# Altium PCB encoder.PcbDoc
Units mm, origin at the board's own origin, x right, y up, seen from the top; angles counter-clockwise.
Board outline 65.16 x 54.74 mm, 2 copper layers (Top Layer, Bottom Layer); 18 components, 21 nets, 72 pads, 10 vias.
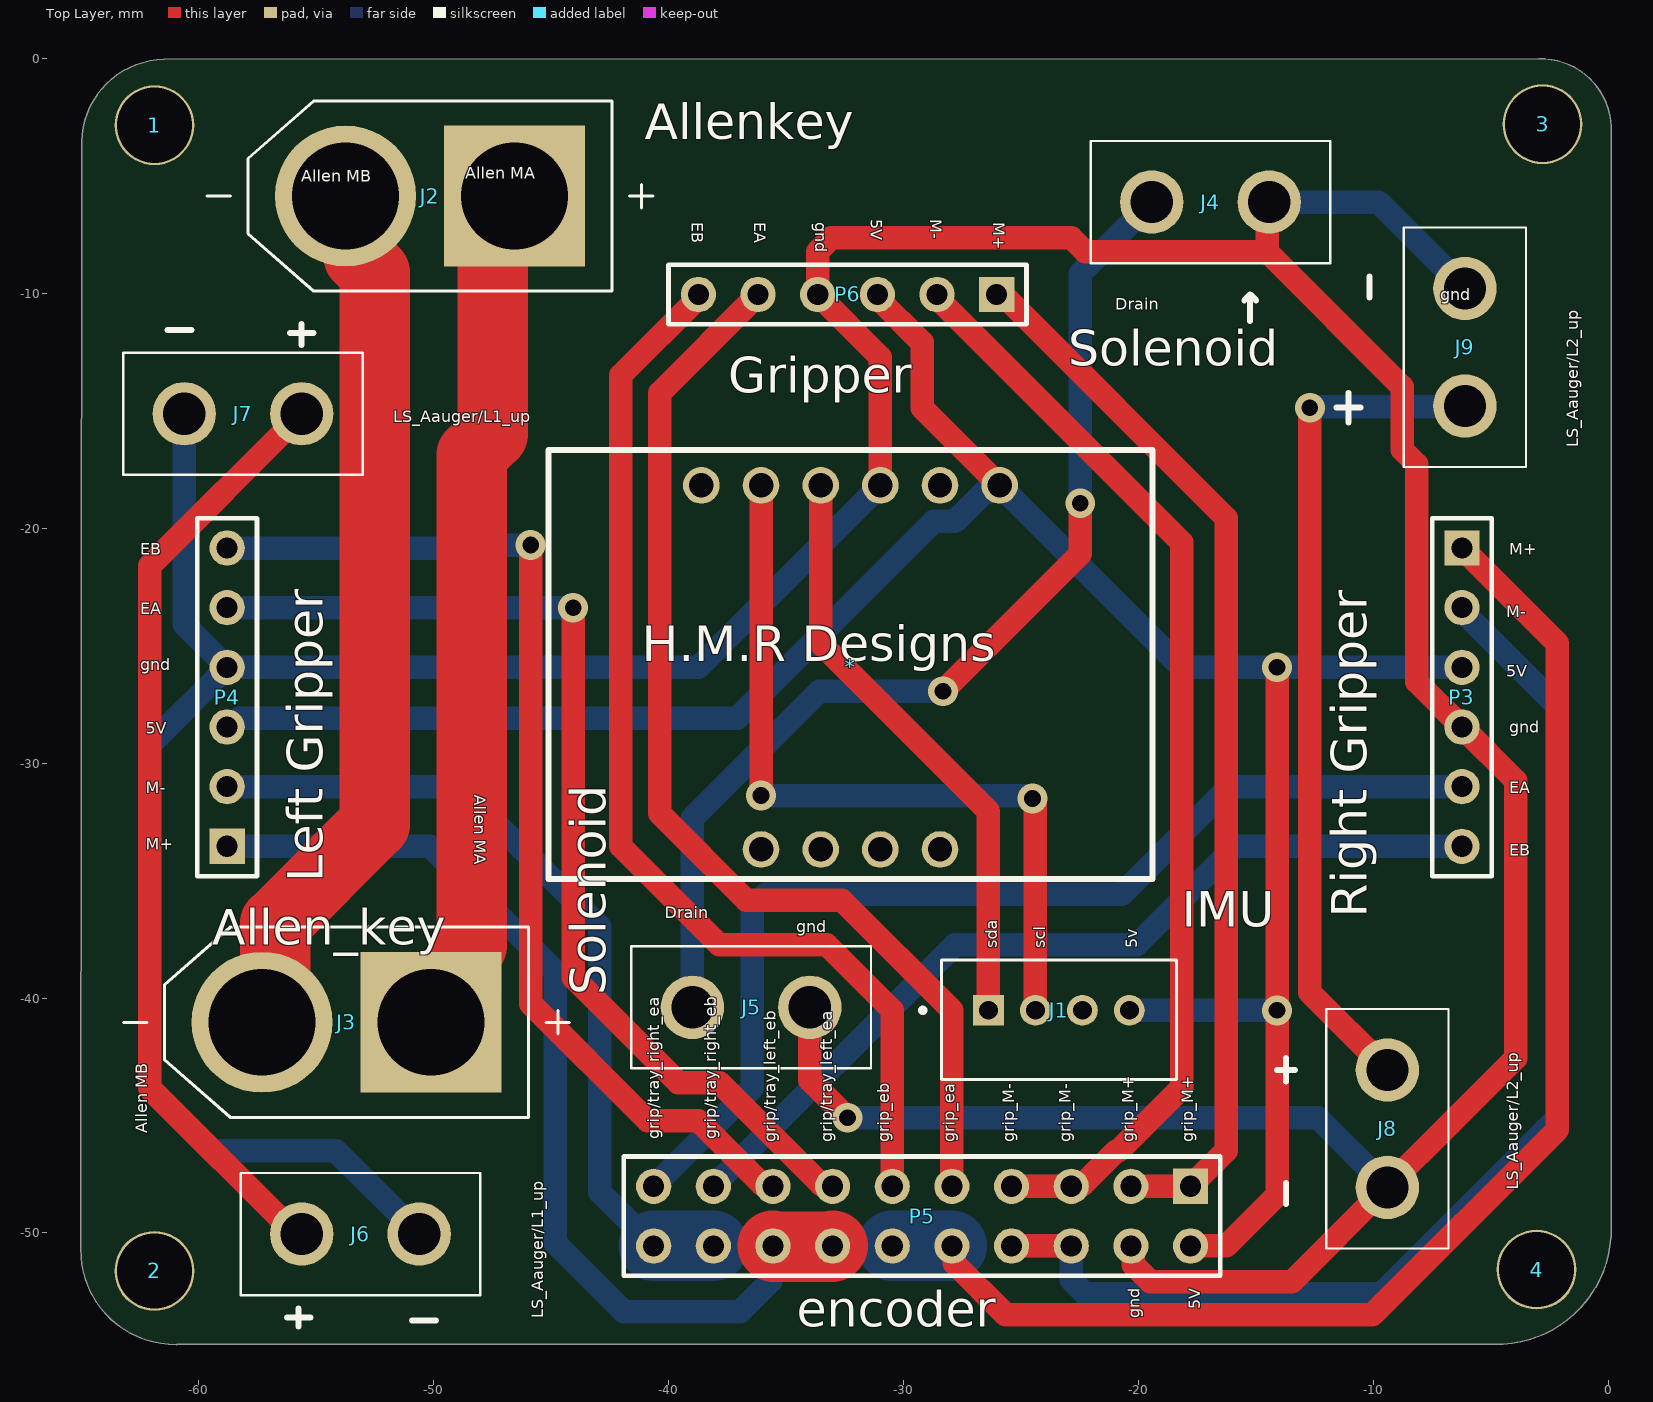
[diagram p0: Top Layer view]
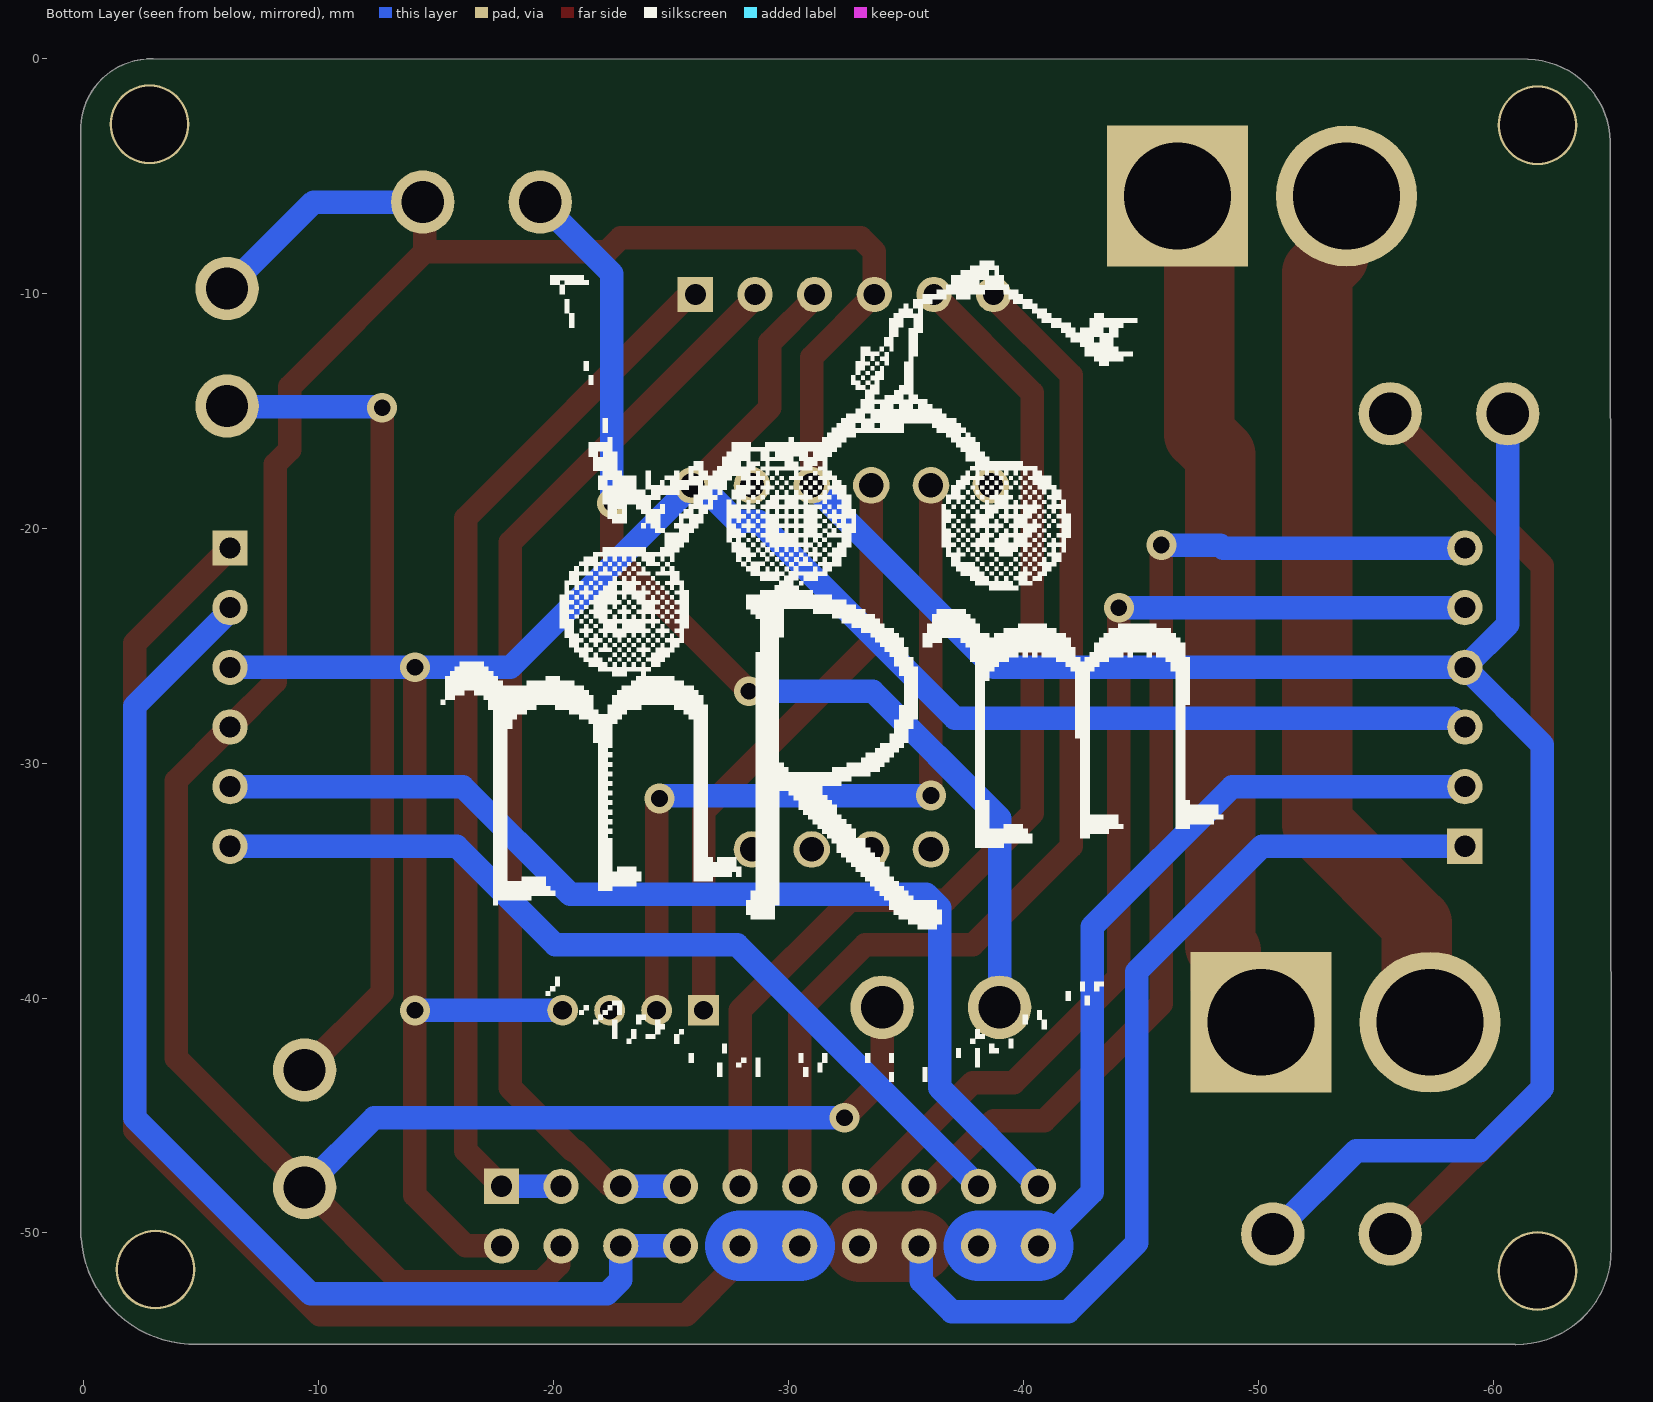
[diagram p1: Bottom Layer view, seen from below]
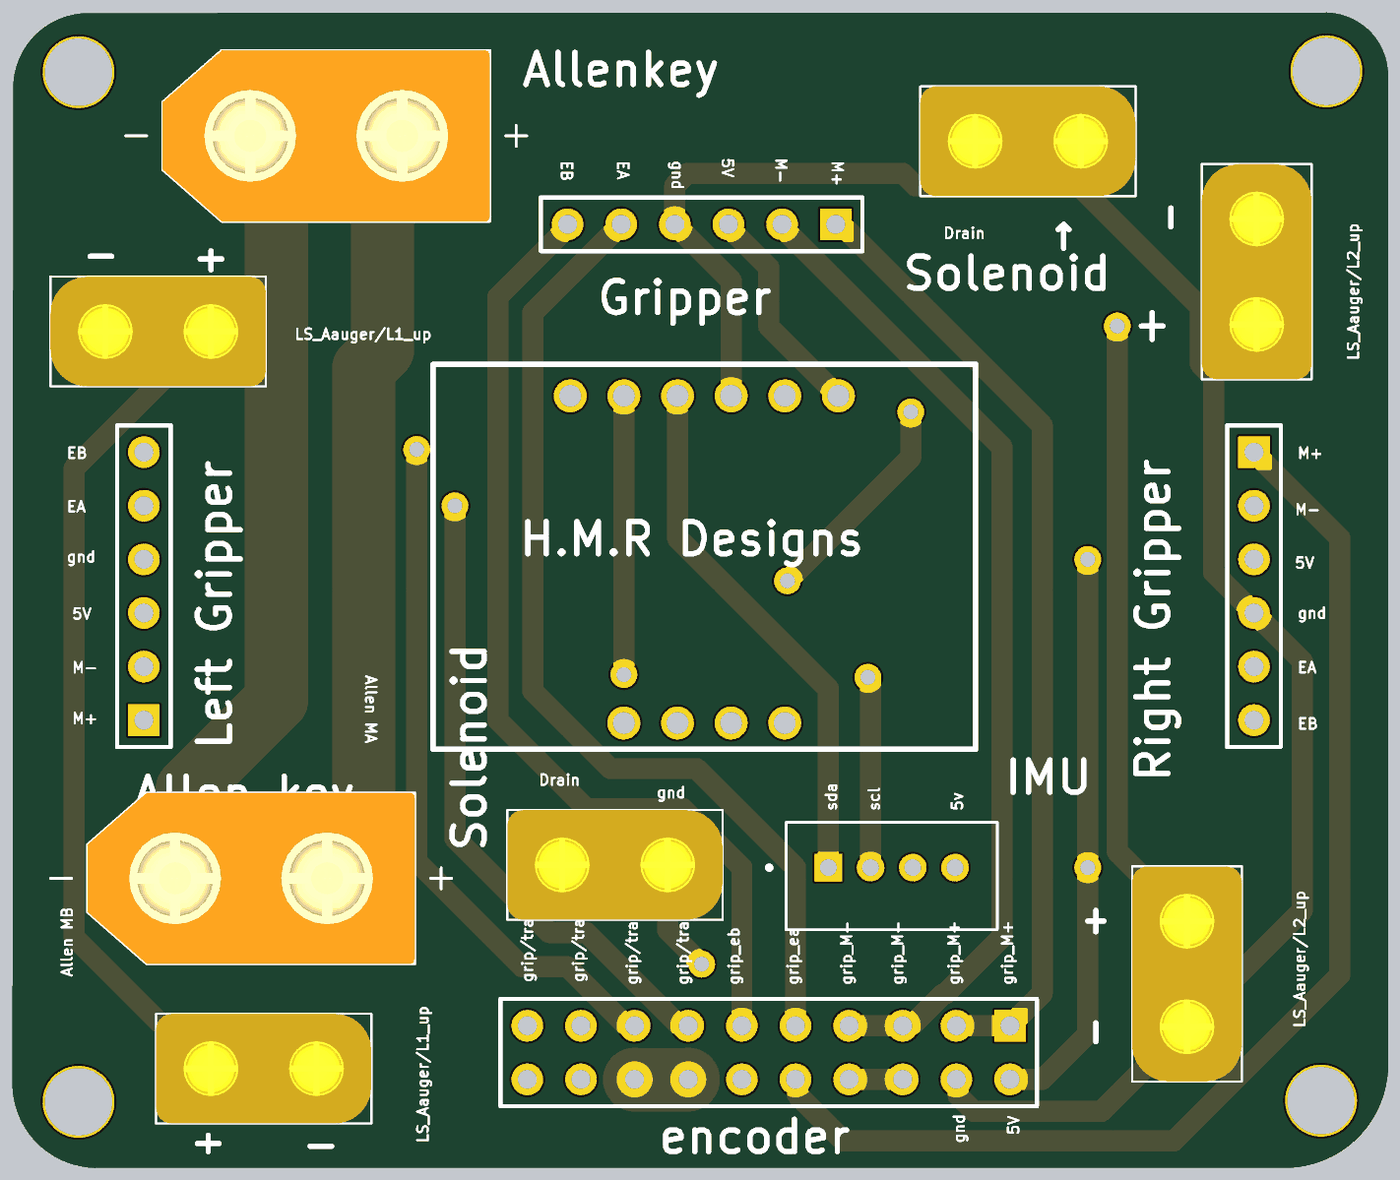
[diagram p2: 3D render of the assembled board from above, using the file's embedded part models]

## Layer stack, top to bottom
Top Solder: solder mask 0.0102, Solder Resist, Dk 3.5
Top Layer: signal copper 0.0356
Dielectric 1: dielectric 0.32, FR-4, Dk 4.8
Bottom Layer: signal copper 0.0356
Bottom Solder: solder mask 0.0102, Solder Resist, Dk 3.5

## Board outline
-65.029,-50.678 ccw(c-61.023,-50.744) -60.958,-54.749 ccw(c-60.96,-54.622) -60.928,-54.745 -4.855,-54.745 ccw(c-4.826,-54.621) -4.828,-54.748 ccw(c-4.762,-49.855) 0.117,-50.222 ccw(c0,-50.172) 0.127,-50.172 0.127,-50.044 0.127,-2.921 ccw(c0.001,-2.921) 0.127,-2.907 ccw(c-2.857,-2.992) -2.93,-0.008 ccw(c-2.92,-0.456) -2.932,-0.008 -2.93,-0.008 -61.494,-0.033 ccw(c-61.494,-0.133) -61.496,-0.033 ccw(c-61.432,-3.593) -64.991,-3.525 ccw(c-64.862,-3.528) -64.991,-3.528 -65.024,-50.648 ccw(c-64.901,-50.68)

## Design rules (kind name [scope] priority, off if disabled: settings)
Clearance [All] p1: gap=0.254 ignorepadtopadclearanceinfootprint=FALSE except(0: Arc-Hole Track-Hole SMDPad-Hole THPad-Hole Via-Hole Fill-Hole Poly-Hole Region-Hole Text-Hole)
PolygonConnect [All] p1: connectstyle=Relief reliefconductorwidth=0.254 reliefentries=4 polygonreliefangle="90 Angle" airgapwidth=0.254
RoutingVias [All] p1: holewidth=0.711 width=1.27 viastyle="Through Hole" minholewidth=0.711 minwidth=1.27 maxholewidth=0.711 maxwidth=1.27
SolderMaskExpansion [All] p1: expansion=0.102 istentingtop=FALSE
Width [All] p1: maxlimit=10 minlimit=0.254 preferedwidth=3 minimp=50.000000 maximp=50.000000 favimp=50.000000
30 further rules are at their usual default settings.

## Components (designator, comment, footprint, x,y, rotation, side; value= is the part's Value field where it differs from the comment)
1 "mountinghole_np" np_mountinghole#1 -62.357,-3.135 r90 top
2 "mountinghole_np" np_mountinghole#2 -61.849,-52.204 r90 top
3 "mountinghole_np" np_mountinghole#3 -3.477,-3.985 r90 top
4 "mountinghole_np" np_mountinghole#4 -2.048,-51.546 r90 top
* "bno" BNO -25.908,-18.168 r180 top
J1 "110990030" SEEED_110990030 -23.384,-40.52 r0 top
J2 "XT60-M" AMASS_XT60-M -50.165,-5.849 r180 top
J3 "XT60-M" AMASS_XT60-M -53.721,-41.028 r180 top
J4 "XT30PB" XT30PB -19.431,-6.103 r90 top
J5 "XT30PB" XT30PB -38.989,-40.393 r90 top
J6 "XT30PB" XT30PB -55.626,-50.045 r90 top
J7 "XT30PB" XT30PB -55.626,-15.12 r270 top
J8 "XT30PB" XT30PB -9.398,-43.06 r0 top
J9 "XT30PB" XT30PB -6.096,-14.786 r180 top
P3 "Header 6" HDR1X6 -6.223,-20.835 r270 top
P4 "Header 6" HDR1X6 -58.801,-33.535 r90 top
P5 "Header 10X2" HDR2X10 -17.78,-48.013 r180 top
P6 "Header 6" HDR1X6 -26.035,-10.04 r180 top

## Footprints (in the part's own frame and the unit in brackets; to place one, negate y for a bottom-side part, rotate by r counter-clockwise, add the part's x,y. Pads: shape width x height; smd on the part's side, far side on the other; paste and mask are expansions set on the pad)
AMASS_XT60-M [mm]
  round 6 hole 4.55: N(3.6,0)
  rect 6x6 hole 4.55: P(-3.6,0)
  silkscreen extent -9.5,-4.05 9.5,4.05, body extent -7.75,-4.05 7.75,4.05, height 16
BNO [mm]
  round 1.56 hole 1.04: 6(5.08,15.5) 7(7.62,15.5) 8(10.16,15.5) 9(2.54,15.5) 10(5.08,0) 11(7.62,0) 12(0,0) 13(2.54,0) 14(10.16,0) 15(12.7,0)
  silkscreen extent -6.5,-1.5 19.2,16.75
HDR1X6 [mm] "Connector; Header; 6 Position"
  rect 1.5x1.5 hole 0.9: 1(0,0)
  round 1.5 hole 0.9: 2(2.54,0) 3(5.08,0) 4(7.62,0) 5(10.16,0) 6(12.7,0)
  silkscreen extent -1.27,-1.27 13.97,1.27
HDR2X10 [mm] "Connector; Header; 10x2 Position"
  rect 1.5x1.5 hole 0.9: 1(0,0)
  round 1.5 hole 0.9: 2(0,2.54) 3(2.54,0) 4(2.54,2.54) 5(5.08,0) 6(5.08,2.54) 7(7.62,0) 8(7.62,2.54) 9(10.16,0) 10(10.16,2.54) 11(12.7,0) 12(12.7,2.54) 13(15.24,0) 14(15.24,2.54) 15(17.78,0) 16(17.78,2.54) 17(20.32,0) 18(20.32,2.54) 19(22.86,0) 20(22.86,2.54)
  silkscreen extent -1.27,-1.27 24.13,3.81
np_mountinghole#1 [mm]
  round 3.4 hole 3.2 unplated: MH_NP_6mm(0.302,-0.46)
np_mountinghole#2 [mm]
  round 3.4 hole 3.2 unplated: MH_NP_6mm(0.587,0.048)
np_mountinghole#3 [mm]
  round 3.4 hole 3.2 unplated: MH_NP_6mm(1.191,-0.683)
np_mountinghole#4 [mm]
  round 3.4 hole 3.2 unplated: MH_NP_6mm(-0.016,1)
SEEED_110990030 [mm]
  rect 1.308x1.308 hole 0.8: 1(-3,0)
  round 1.308 hole 0.8: 2(-1,0) 3(1,0) 4(3,0)
  silkscreen extent -5.9,-2.95 5,2.15
XT30PB [mm]
  round 2.7 hole 1.8: 1(0,0) 2(0,-5)
  silkscreen extent -2.6,-7.6 2.6,2.6, body extent -2.6,-7.6 2.6,2.6, height 10.66

## Part data
J1: "GROVE 2MM 4PIN VERT CONN 10PCS", Package=None, Arrow_Electronics-Purchase-URL=https://snapeda.com/shop?store=Arrow+Electronics&id=583576, Availability=Good, MF="Seeed Technology", Mouser-Purchase-URL=https://snapeda.com/shop?store=Mouser&id=583576, MP=110990030, Price=None, SnapEDA_Link=https://www.snapeda.com/parts/110990030/Seeed%20Technology%20Co.,%20Ltd/view-part/583576/?ref=snap
J2 J3: "Plug; DC supply; XT60; male; PIN: 2; for cable; soldered; 30A; 500V", Package=Package, Availability="Not in stock", Check_prices=https://www.snapeda.com/parts/XT60-M/AMASS/view-part/?ref=eda, MF=AMASS, MP=XT60-M, Price=None, SnapEDA_Link=https://www.snapeda.com/parts/XT60-M/AMASS/view-part/?ref=snap
J4 J5 J6 J7 J8 J9: "Connector", Manufacturer_Name=Amass, Datasheet Link=https://www.tme.eu/Document/4acc913878197f8c2e30d4b8cdc47230/XT30UPB%20SPEC.pdf, Height=10.7mm, Manufacturer_Part_Number=XT30PB
P3 P4 P6: "Header, 6-Pin", LatestRevisionDate=17-Jul-2002, LatestRevisionNote="Re-released for DXP Platform.", Publisher="Altium Limited"
P5: "Header, 10-Pin, Dual row", LatestRevisionDate=17-Jul-2002, LatestRevisionNote="Re-released for DXP Platform.", Publisher="Altium Limited"

## Via types
v1: diameter 1.27, hole 0.711, Top Layer to Bottom Layer, 10 vias

## Nets (pads, with @x,y where several pads share a name; then routed paths per layer and width w, separated by ;. In a path a pad name is that pad's centre, name@x,y a point inside that pad or via, vN(x,y) a via of type N, cw(c..) or ccw(c..) an arc to the next point about the centre after c; other vN are vias at no path point)
Net*_10: *.10 J4.2 J5.2 J6.2 J7.2 J8.2 J9.2 P3.4 P4.4 P5.4 P6.4 | length 208.1
  Top Layer w1: J5.2 -33.989,-43.488 v1(-32.385,-45.092) ; *.10 -30.988,-12.707 P6.4 -33.655,-8.213 -33.069,-7.627 -22.86,-7.627 -22.266,-8.222 -14.519,-8.222 ; P5.4 -20.224,-50.649 -20.224,-51.344 -19.49,-52.077 -13.462,-52.077 -9.421,-48.037 -6.73,-45.346 -3.937,-42.552 -3.937,-30.741 P3.4 -8.144,-26.534 -8.144,-17.268 -8.763,-16.649 -8.763,-13.977 -14.519,-8.222 ; J4.2@-14.859,-6.357 -14.519,-6.698 -14.519,-8.222
  Bottom Layer w1: J7.2 -60.626,-24.09 P4.4 ; J6.2 -54.182,-46.489 -59.436,-46.489 -62.103,-43.822 -62.103,-29.217 P4.4 ; v1(-32.385,-45.092) -12.366,-45.092 J8.2 ; *.10 -38.735,-25.915 P4.4 ; J4.2 -9.779,-6.103 J9.2
Net*_11: *.11 J1.1 | length 25.3
  Top Layer w1: *.11 -33.528,-24.899 -26.384,-32.043 J1.1
Net*_12: *.12 J1.4 P3.3 P4.3 P5.2 P6.3 | length 103.7
  Top Layer w1: P6.3 -31.115,-10.176 -29.21,-12.081 -29.21,-14.866 *.12 ; P5.2 -16.256,-50.553 -14.097,-48.394 v1(-14.097,-40.52) v1(-14.097,-25.915)
  Bottom Layer w1: P4.3 -58.666,-28.455 -58.285,-28.074 -37.084,-28.074 -28.712,-19.702 -27.813,-19.702 -26.559,-18.448 -26.34,-18.448 -26.06,-18.168 *.12 -18.161,-25.915 P3.3 ; J1.4 v1(-14.097,-40.52)
Net*_14: *.14 J1.2 | length 33.9
  Top Layer w1: v1(-36.068,-31.376) *.14 ; v1(-24.511,-31.503) -24.511,-31.576 -24.384,-31.703 J1.2
  Bottom Layer w1: v1(-36.068,-31.376) -24.711,-31.376 -24.584,-31.503 v1(-24.511,-31.503)
NetJ2_N: J2.N J3.N | length 37.7
  Top Layer w3: J3.N -56.747,-40.454 -56.747,-36.815 -52.522,-32.59 -52.522,-9.107 -53.191,-8.438 -53.191,-6.423 J2.N
NetJ2_P: J2.P J3.P | length 36.7
  Top Layer w3: J3.P -48.621,-39.528 -48.621,-38.005 -48.387,-37.771 -48.387,-16.873 -47.498,-15.984 -47.498,-6.782 J2.P
NetJ4_1: J4.1 J5.1 | length 45.5
  Top Layer w1: v1(-28.321,-26.931) -22.479,-21.089 v1(-22.479,-18.93)
  Bottom Layer w1: J5.1 -38.989,-32.333 -33.587,-26.931 v1(-28.321,-26.931) ; v1(-22.479,-18.93) -22.479,-9.151 J4.1
NetJ6_1: J6.1 J7.1 | length 40.4
  Top Layer w1: J6.1 -55.88,-50.045 -62.103,-43.822 -62.103,-21.597 J7.1
NetJ8_1: J8.1 J9.1 | length 36.2
  Top Layer w1: v1(-12.7,-14.859) -12.7,-39.758 J8.1
  Bottom Layer w1: v1(-12.7,-14.859) -12.664,-14.823 -6.132,-14.823 J9.1
NetP3_1: P3.1 P5.10 P5.12 | length 59.6
  Top Layer w1: P5.10 -27.844,-50.649 -27.844,-51.284 -25.654,-53.474 -10.033,-53.474 -2.159,-45.6 -2.159,-24.899 P3.1
  Bottom Layer w3: P5.12 P5.10
NetP3_2: P3.2 P5.6 P5.8 | length 54
  Top Layer w1: P5.8 P5.6
  Bottom Layer w1: P5.8 P5.6 -22.86,-52 -22.274,-52.585 -9.652,-52.585 -2.159,-45.092 -2.159,-27.575 -6.223,-23.511 P3.2
NetP3_5: P3.5 P5.19 | length 46
  Bottom Layer w1: P5.19 -36.449,-43.822 -36.449,-36.153 -35.863,-35.567 -20.701,-35.567 -16.129,-30.995 P3.5
NetP3_6: P3.6 P5.17 | length 37.9
  Bottom Layer w1: P5.17 -27.813,-37.726 -20.066,-37.726 -15.875,-33.535 P3.6
NetP4_1: P4.1 P5.14 P5.16 | length 42.8
  Top Layer w3: P5.16 -35.533,-50.581 -33.047,-50.581 P5.14
  Bottom Layer w1: P4.1 -50.165,-33.535 -44.831,-38.869 -44.831,-50.426 -41.91,-53.347 -36.957,-53.347 -35.656,-52.046 -35.656,-50.649 P5.16
NetP4_2: P4.2 P5.18 P5.20 | length 35.4
  Bottom Layer w1: P4.2 -48.895,-30.995 -42.926,-36.964 -42.926,-48.267 P5.20
  Bottom Layer w3: P5.20 P5.18
NetP4_5: P4.5 P5.13 | length 45.2
  Top Layer w1: v1(-44.069,-23.375) -44.069,-39.123 -39.595,-43.597 -37.849,-43.597 -33.529,-47.918 -33.116,-47.918 P5.13
  Bottom Layer w1: P4.5 v1(-44.069,-23.375)
NetP4_6: P4.6 P5.15 | length 46
  Top Layer w1: v1(-45.879,-20.708) -45.879,-40.234 -40.894,-45.219 -38.735,-45.219 -36.037,-47.918 -35.656,-47.918 P5.15
  Bottom Layer w1: P4.6 -48.514,-20.835 -48.387,-20.708 v1(-45.879,-20.708)
NetP5_1: P5.1 P5.3 P6.1 | length 47.9
  Top Layer w1: P6.1 -25.785,-10.29 -25.531,-10.29 -16.256,-19.565 -16.256,-46.489 P5.1 P5.3
  Bottom Layer w1: P5.3 P5.1
NetP5_5: P5.5 P5.7 P6.2 | length 49.6
  Top Layer w1: P6.2 -28.575,-10.176 -18.161,-20.59 -18.161,-43.822 -20.848,-46.509 -20.943,-46.509 -22.351,-47.918 -22.764,-47.918 P5.5 P5.7
  Bottom Layer w1: P5.7 P5.5
NetP5_9: P5.9 P6.5 | length 47.2
  Top Layer w1: P6.5 -40.386,-14.231 -40.386,-32.138 -36.695,-35.829 -32.631,-35.829 -27.94,-40.52 P5.9
NetP5_11: P5.11 P6.6 | length 46.8
  Top Layer w1: P6.6 -38.735,-10.176 -42.037,-13.478 -42.037,-33.535 -37.846,-37.726 -33.267,-37.726 -30.48,-40.513 P5.11
pads on no net: 1.MH_NP_6mm 2.MH_NP_6mm 3.MH_NP_6mm 4.MH_NP_6mm *.6 *.7 *.8 *.9 *.13 *.15 J1.3

## Silkscreen, mask and mechanical layers (free items; w line width, h text height)
Top Overlay:
  lines w0.254: -61.341,-11.557 -60.325,-11.557 ; -56.261,-53.594 -55.245,-53.594 ; -56.134,-11.684 -55.118,-11.684 -55.372,-11.684 -55.88,-11.684 ; -55.753,-53.975 -55.753,-53.213 ; -55.626,-12.192 -55.626,-11.938 -55.626,-11.303 ; -50.927,-53.721 -49.911,-53.721 ; -15.494,-10.287 -15.24,-10.033 ; -15.24,-11.176 -15.24,-10.033 ; -14.986,-10.287 -15.24,-10.033 ; -14.097,-43.053 -13.335,-43.053 ; -13.716,-48.768 -13.716,-47.879 ; -13.716,-43.561 -13.716,-42.545 ; -11.557,-14.859 -10.541,-14.859 ; -11.049,-15.494 -11.049,-14.224 ; -10.16,-10.16 -10.16,-9.271
  text "Allenkey" at -41.021,-3.429 h1.52
  text "Allen MA" at -48.668,-5.114 h0.5
  text "Allen MB" at -55.653,-5.241 h0.5
  text "5V" at -31.396,-6.838 h0.5 r270
  text "M-" at -28.856,-6.838 h0.5 r270
  text "EB" at -39.016,-6.965 h0.5 r270
  text "EA" at -36.349,-6.965 h0.5 r270
  text "gnd" at -33.769,-6.965 h0.5 r270
  text "M+" at -26.189,-6.965 h0.5 r270
  text "gnd" at -7.139,-10.282 h0.5
  text "Drain" at -20.982,-10.695 h0.5
  text "Solenoid" at -22.987,-13.081 h1.52
  text "Gripper" at -37.465,-14.232 h1.52
  text "LS_Aauger/L1_up" at -51.723,-15.481 h0.5
  text "LS_Aauger/L2_up" at -1.283,-16.537 h0.5 r90
  text "EB" at -62.511,-21.116 h0.5
  text "M+" at -4.218,-21.116 h0.5
  text "EA" at -62.511,-23.656 h0.5
  text "M-" at -4.345,-23.783 h0.5
  text "H.M.R Designs" at -41.148,-25.662 h1.52
  text "gnd" at -62.511,-26.03 h0.5
  text "5V" at -4.345,-26.323 h0.5
  text "gnd" at -4.218,-28.697 h0.5
  text "5V" at -62.257,-28.736 h0.5
  text "M-" at -62.257,-31.276 h0.5
  text "EA" at -4.218,-31.276 h0.5
  text "Allen MA" at -48.287,-31.342 h0.5 r270
  text "M+" at -62.257,-33.689 h0.5
  text "EB" at -4.218,-33.943 h0.5
  text "Left Gripper" at -54.737,-35.059 h1.52 r90
  text "Right Gripper" at -10.287,-36.583 h1.52 r90
  text "Drain" at -40.159,-36.603 h0.5
  text "IMU" at -18.161,-36.957 h1.52
  text "gnd" at -34.571,-37.198 h0.5
  text "Allen_key" at -59.436,-37.727 h1.52
  text "sda" at -26.008,-37.88 h0.5 r90
  text "scl" at -23.976,-37.88 h0.5 r90
  text "5v" at -20.039,-37.88 h0.5 r90
  text "Solenoid" at -42.672,-39.878 h1.52 r90
  text "Allen MB" at -62.203,-45.747 h0.5 r90
  text "grip/tray_right_ea" at -40.399,-46.008 h0.5 r90
  text "grip/tray_right_eb" at -37.986,-46.008 h0.5 r90
  text "grip/tray_left_eb" at -35.446,-46.135 h0.5 r90
  text "grip/tray_left_ea" at -33.033,-46.135 h0.5 r90
  text "grip_eb" at -30.62,-46.135 h0.5 r90
  text "grip_ea" at -27.826,-46.135 h0.5 r90
  text "grip_M-" at -25.286,-46.135 h0.5 r90
  text "grip_M-" at -22.873,-46.135 h0.5 r90
  text "grip_M+" at -20.206,-46.135 h0.5 r90
  text "grip_M+" at -17.666,-46.135 h0.5 r90
  text "LS_Aauger/L2_up" at -3.823,-48.16 h0.5 r90
  text "5V" at -17.372,-53.247 h0.5 r90
  text "LS_Aauger/L1_up" at -45.352,-53.621 h0.5 r90
  text "gnd" at -19.952,-53.628 h0.5 r90
  text "encoder" at -34.544,-53.982 h1.52
Bottom Overlay:
  drawing of 40 lines, arcs and shapes, not listed
Mechanical 15:
  lines w0.254: -64.901,-50.68 ccw(c-61.023,-50.744) -60.96,-54.622 ; -64.897,-50.68 -64.864,-3.528 cw(c-61.432,-3.593) -61.494,-0.16 -2.929,-0.136 cw(c-2.857,-2.992) 0,-2.921 ; -60.96,-54.617 -4.826,-54.617 ; -4.826,-54.621 ccw(c-4.762,-49.855) 0,-50.045 ; 0,-50.172 0,-2.921 ; 0,-2.921 0,-2.921